# Altium PCB finalproject.PcbDoc
Units mil, origin at the board's own origin, x right, y up, seen from the top; angles counter-clockwise.
Board outline 3850 x 3500 mil, 2 copper layers (Top Layer, Bottom Layer); 22 components, 43 nets, 155 pads, 4 vias.
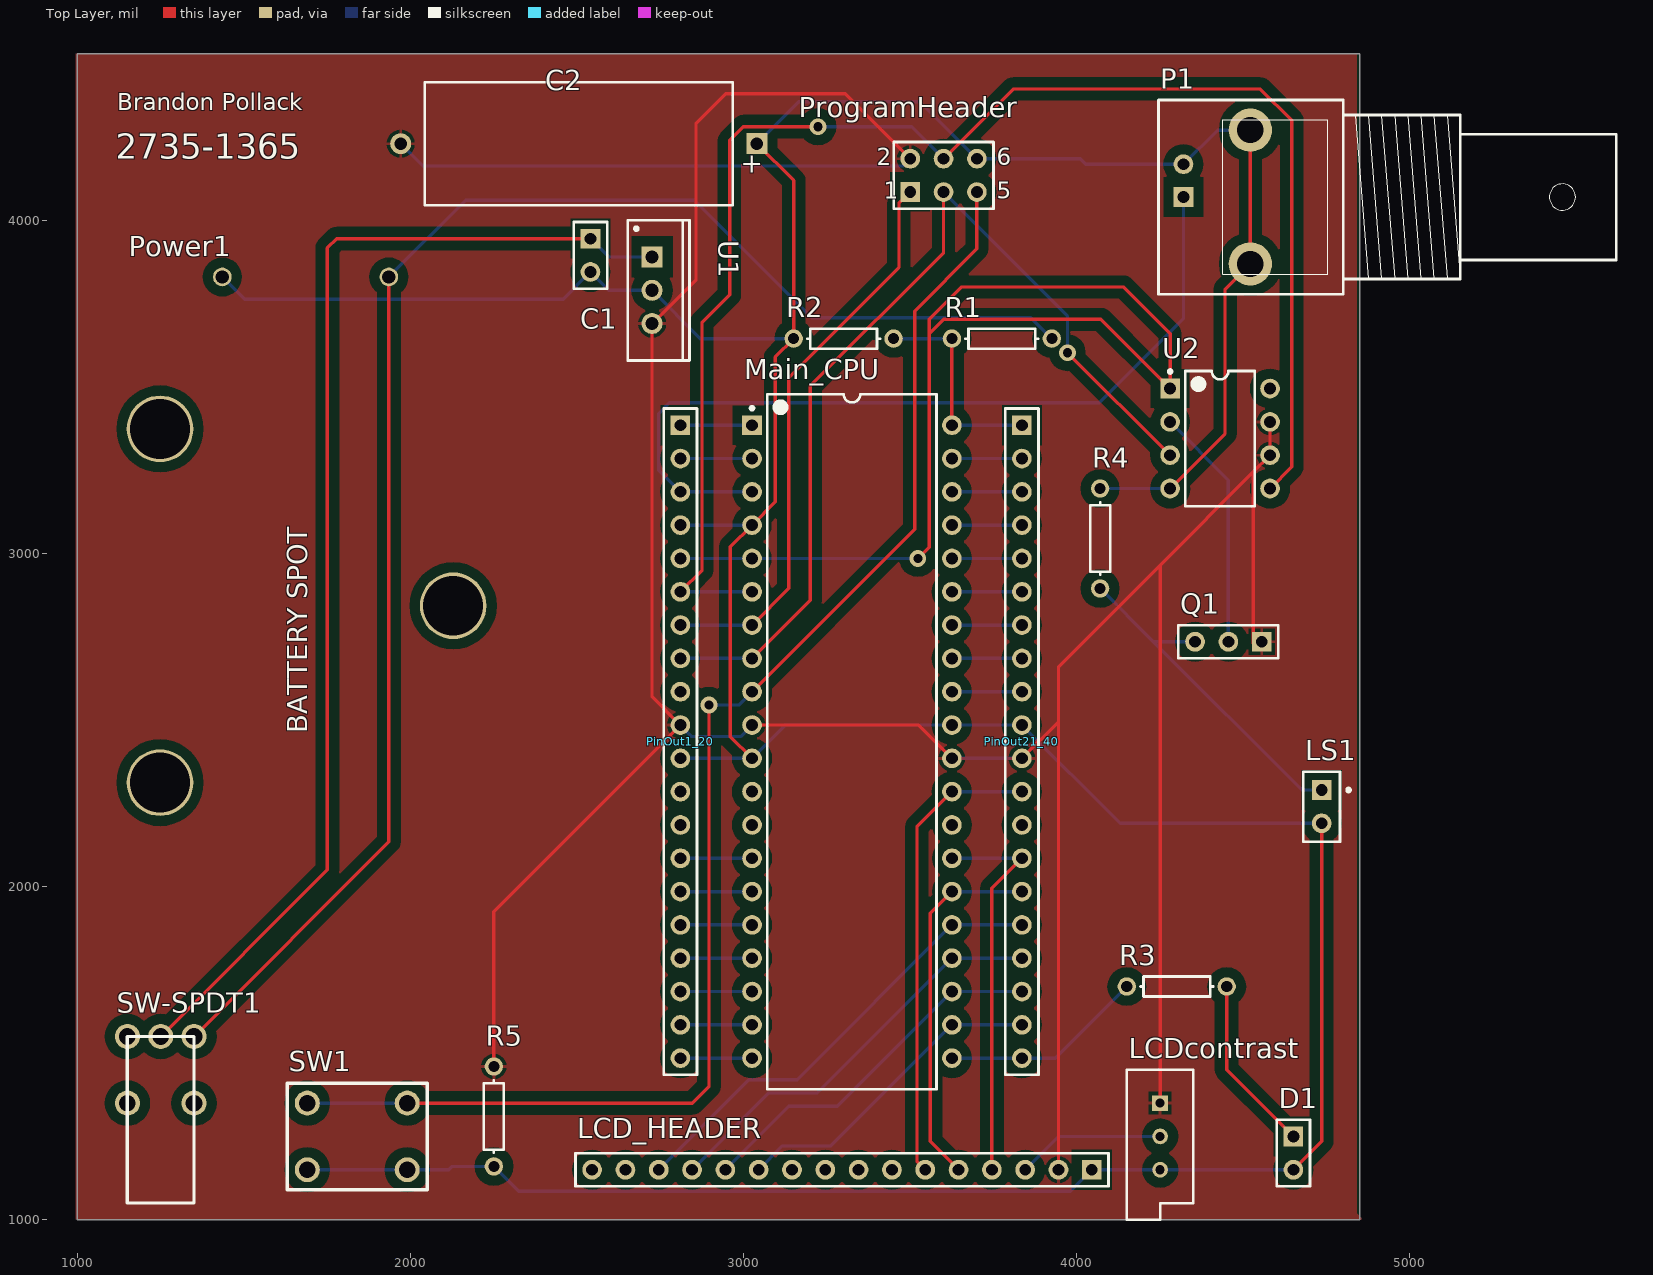
[diagram p0: Top Layer view]
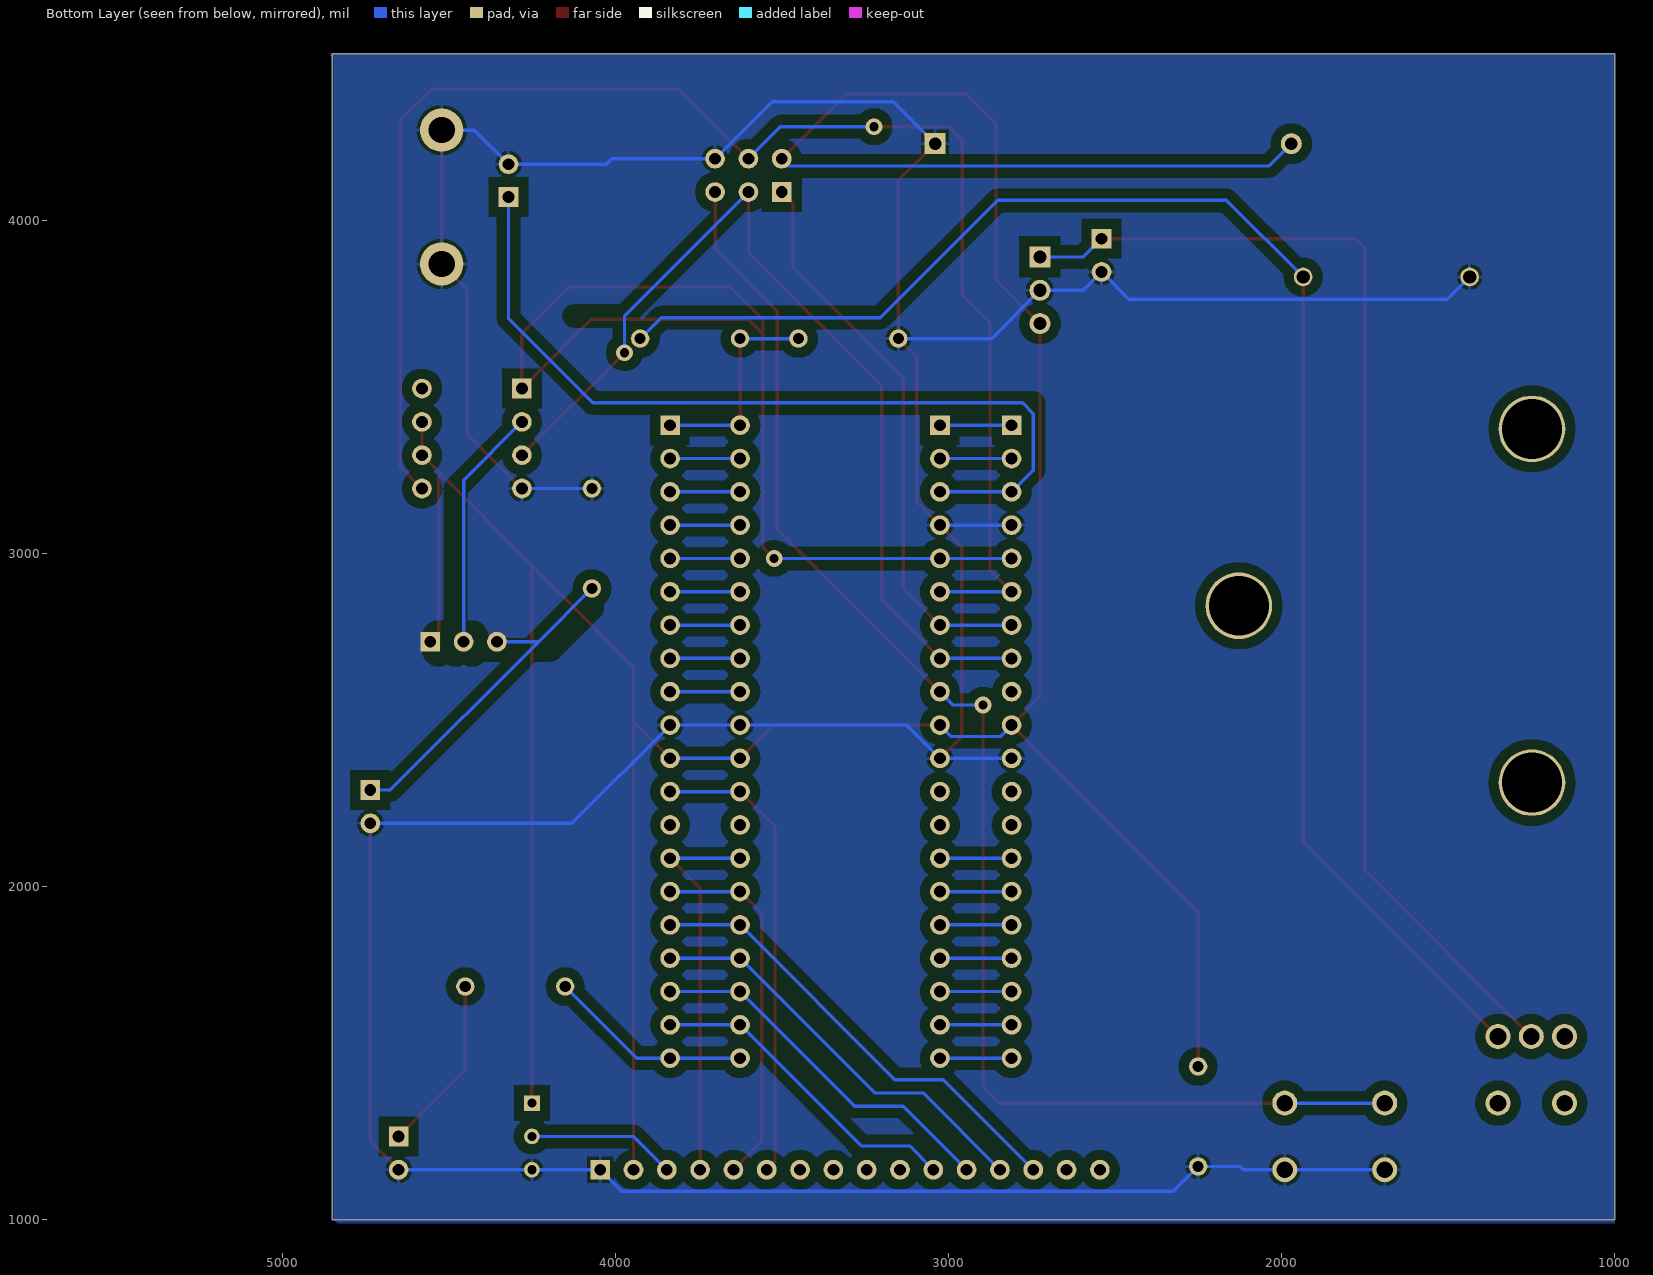
[diagram p1: Bottom Layer view, seen from below]

## Layer stack, top to bottom
Top Layer: signal copper 1.4
Dielectric: core 12.6, FR-4, Dk 4.8
Bottom Layer: signal copper 1.4

## Board outline
1000,1000 1000,4500 4850,4500 4850,1000 1000,1000

## Design rules (kind name [scope] priority, off if disabled: settings)
Clearance Poly [InPolygon] p1: gap=30
Clearance [All] p2: gap=10
PolygonConnect [All] p1: connectstyle=Relief reliefconductorwidth=10 reliefentries=4 polygonreliefangle="90 Angle" airgapwidth=10
RoutingVias [All] p1: holewidth=28 width=50 viastyle="Through Hole" minholewidth=28 minwidth=50 maxholewidth=28 maxwidth=50
ShortCircuit [All] p1: allowed=TRUE
SilkscreenOverComponentPads [All] p1: minsilkscreentomaskgap=10
SolderMaskExpansion [All] p1: expansion=4
Width [All] p1: maxlimit=100 minlimit=7 preferedwidth=10
26 further rules are at their usual default settings.

## Components (designator, comment, footprint, x,y, rotation, side; value= is the part's Value field where it differs from the comment)
C1 "Cap Pol1" HDR1X2 2540,3945 r270 top
C2 "Cap" CSR13-D 2505,4230 r180 top
D1 "LED0" HDR1X2 4650,1250 r270 top
LCD_HEADER "Header 16" HDR1X16 4045,1150 r180 top
LCDcontrast "RPot" VR5 4250,1250 r270 top
LS1 "Speaker" PIN2 4735,2290 r270 top
Main_CPU "ATmega324PA-PU" 40P6 3325,2435 r0 top
P1 "BNC FOR FREQGEN" "BNC_RA CON" 4320,4070 r180 top
PinOut1_20 "Header 20" HDR1X20 2810,3385 r270 top
PinOut21_40 "Header 20" HDR1X20 3835,3385 r270 top
Power1 "Battery Holder 9V" "PCBComponent_1 - duplicate" 1435,3830 r90 top
ProgramHeader "Header 3X2" HDR2X3 3500,4085 r0 top
Q1 "MOSFET-N" HDR1X3 4555,2735 r180 top
R1 "Res1" AXIAL-0.3 3775,3645 r0 top
R2 "Res2" AXIAL-0.3 3300,3645 r0 top
R3 "Res1" AXIAL-0.3 4300,1700 r0 top
R4 "Res1" AXIAL-0.3 4070,3045 r270 top
R5 "Res1" AXIAL-0.3 2250,1310 r90 top
SW1 "push button switch" SW-PUSH-4 1990,1350 r180 top
SW-SPDT1 "Component_1" PCBComponent_1 1250,1550 r0 top
U1 "LM2940T-5.0" T03B 2725,3790 r270 top
U2 "LTC1661" DIP-8 4430,3345 r0 top

## Footprints (in the part's own frame and the unit in brackets; to place one, negate y for a bottom-side part, rotate by r counter-clockwise, add the part's x,y. Pads: shape width x height; smd on the part's side, far side on the other; paste and mask are expansions set on the pad)
40P6 [mm] "DIP, 40-Leads, Row Spacing 15.24mm, Pitch 2.54mm, Body 52.2x13.95mm"
  rect 1.5x1.5 hole 0.9: 1(-7.62,24.13)
  round 1.5 hole 0.9: 2(-7.62,21.59) 3(-7.62,19.05) 4(-7.62,16.51) 5(-7.62,13.97) 6(-7.62,11.43) 7(-7.62,8.89) 8(-7.62,6.35) 9(-7.62,3.81) 10(-7.62,1.27) 11(-7.62,-1.27) 12(-7.62,-3.81) 13(-7.62,-6.35) 14(-7.62,-8.89) 15(-7.62,-11.43) 16(-7.62,-13.97) 17(-7.62,-16.51) 18(-7.62,-19.05) 19(-7.62,-21.59) 20(-7.62,-24.13) 21(7.62,-24.13) 22(7.62,-21.59) 23(7.62,-19.05) 24(7.62,-16.51) 25(7.62,-13.97) 26(7.62,-11.43) 27(7.62,-8.89) 28(7.62,-6.35) 29(7.62,-3.81) 30(7.62,-1.27) 31(7.62,1.27) 32(7.62,3.81) 33(7.62,6.35) 34(7.62,8.89) 35(7.62,11.43) 36(7.62,13.97) 37(7.62,16.51) 38(7.62,19.05) 39(7.62,21.59) 40(7.62,24.13)
  silkscreen extent -7.74,-26.5 6.45,26.5, body extent -7.05,-26.47 7.05,26.47, height 4.83
AXIAL-0.3 [mm] "Axial Device, Thru-Hole; 2 Leads; 0.3 in Pin Spacing"
  round 1.4 hole 0.85: 1(-3.81,0) 2(3.81,0)
  silkscreen extent -2.77,-0.76 2.77,0.76
"BNC_RA CON" [mm] "Connector; BNC Elbow"
  rect 1.5x1.5 hole 0.9: 1(0,0)
  round 3.3 hole 2: 2(-5.1,5.1) 2(-5.1,-5.1)
  round 1.5 hole 0.9: 2(0,-2.5)
  silkscreen extent -33,-7.4 1.9,7.4
CSR13-D [mm] "Capacitor, Axial, Polarised; Body 20.8 x 9.3 mm (LxDia. max), Lead Dia. 0.64 mm (typ)"
  rect 1.6x1.6 hole 0.95: 1(-13.58,0)
  round 1.6 hole 0.95: 2(13.58,0)
  silkscreen extent -11.75,-4.7 11.75,4.7
DIP-8 [mm] "DIP; 8 Leads; Row Spacing 7.62 mm; Pitch 2.54 mm"
  rect 1.5x1.5 hole 0.9: 1(-3.81,3.81)
  round 1.5 hole 0.9: 2(-3.81,1.27) 3(-3.81,-1.27) 4(-3.81,-3.81) 5(3.81,-3.81) 6(3.81,-1.27) 7(3.81,1.27) 8(3.81,3.81)
  silkscreen extent -3.93,-5.15 2.65,5.23, body extent -3.6,-5.15 3.6,5.15, height 5.08
HDR1X2 [mm] "Connector; Header; 2 Position"
  rect 1.5x1.5 hole 0.9: 1(0,0)
  round 1.5 hole 0.9: 2(2.54,0)
  silkscreen extent -1.27,-1.27 3.81,1.27
HDR1X3 [mm] "Connector; Header; 3 Position"
  rect 1.5x1.5 hole 0.9: 1(0,0)
  round 1.5 hole 0.9: 2(2.54,0) 3(5.08,0)
  silkscreen extent -1.27,-1.27 6.35,1.27
HDR1X16 [mm] "Connector; Header; 16 Position"
  rect 1.5x1.5 hole 0.9: 1(0,0)
  round 1.5 hole 0.9: 2(2.54,0) 3(5.08,0) 4(7.62,0) 5(10.16,0) 6(12.7,0) 7(15.24,0) 8(17.78,0) 9(20.32,0) 10(22.86,0) 11(25.4,0) 12(27.94,0) 13(30.48,0) 14(33.02,0) 15(35.56,0) 16(38.1,0)
  silkscreen extent -1.27,-1.27 39.37,1.27
HDR1X20 [mm] "Connector; Header; 20 Position"
  rect 1.5x1.5 hole 0.9: 1(0,0)
  round 1.5 hole 0.9: 2(2.54,0) 3(5.08,0) 4(7.62,0) 5(10.16,0) 6(12.7,0) 7(15.24,0) 8(17.78,0) 9(20.32,0) 10(22.86,0) 11(25.4,0) 12(27.94,0) 13(30.48,0) 14(33.02,0) 15(35.56,0) 16(38.1,0) 17(40.64,0) 18(43.18,0) 19(45.72,0) 20(48.26,0)
  silkscreen extent -1.27,-1.27 49.53,1.27
HDR2X3 [mm] "Connector; Header; 3x2 Position"
  rect 1.5x1.5 hole 0.9: 1(0,0)
  round 1.5 hole 0.9: 2(0,2.54) 3(2.54,0) 4(2.54,2.54) 5(5.08,0) 6(5.08,2.54)
  silkscreen extent -1.27,-1.27 6.35,3.81
PCBComponent_1 [mil]
  round 75 hole 50: 0(-100,0) 1(100,0) 2(0,0) 3(-100,-200) 3(100,-200)
  silkscreen extent -100,-500 100,0
"PCBComponent_1 - duplicate" [mil]
  round 56 hole 40: 1(0,-500) 2(0,0)
  round 200 hole 180: 3(-1518,187) 3(-987,-693) 3(-456,187)
PIN2 [mm] "Photosensitive Diode; 2 Leads"
  rect 1.5x1.5 hole 0.9: 1(0,0)
  round 1.5 hole 0.9: 2(2.54,0)
  silkscreen extent -1.4,-1.4 3.94,2.18
SW-PUSH-4 [mil]
  round 75 hole 50: 1(0,200) 1(300,200) 2(0,0) 2(300,0)
  silkscreen extent -60,-60 360,260
T03B [mm] "TO, Thru-Hole, Vertical, Heatsink Mounted; 3 In-Line Leads; Pitch 2.54 mm"
  rect 1.6x1.6 hole 1: 1(-2.54,0)
  round 1.6 hole 1: 2(0,0) 3(2.54,0)
  silkscreen extent -5.35,-1.85 5.35,2.85, body extent -5.4,-1.9 5.4,2.9, height 19.4
VR5 [mm] "Thru-Hole; 3 Leads"
  rect 1.2x1.2 hole 0.7: 1(-2.54,0)
  round 1.2 hole 0.7: 2(0,0) 3(2.54,0)
  silkscreen extent -5.08,-2.54 6.35,2.54

## Part data
C1: "Polarized Capacitor (Radial)"
C2: "Capacitor"
D1: "Typical INFRARED GaAs LED"
LCD_HEADER: "Header, 16-Pin"
LCDcontrast: "Potentiometer"
LS1: "Loudspeaker"
Main_CPU: "8-bit AVR Microcontroller, 32KB Flash, 1KB EEPROM, 2KB SRAM, 40-pin PDIP, Industrial Grade (-40°C to 85°C)"
P1: library part BNC, "BNC Elbow Connector"
PinOut1_20 PinOut21_40: "Header, 20-Pin"
ProgramHeader: "Header, 3-Pin, Dual row"
Q1: "N-Channel MOSFET"
R1 R3 R4 R5: "Resistor"
R2: library part Res1, "Resistor"
SW1: library part SW-PUSH
U1: "1A Low Dropout Regulator, 3-pin TO-220"
U2: library part "Header 4X2", "Header, 4-Pin, Dual row"

## Via types
v1: diameter 50, hole 28, Top Layer to Bottom Layer, 4 vias

## Nets (pads, with @x,y where several pads share a name; then routed paths per layer and width w, separated by ;. In a path a pad name is that pad's centre, name@x,y a point inside that pad or via, vN(x,y) a via of type N, cw(c..) or ccw(c..) an arc to the next point about the centre after c; other vN are vias at no path point)
+5VDC: C2.2 LCD_HEADER.2 LCDcontrast.1 Main_CPU.10 Main_CPU.30 PinOut1_20.10 PinOut21_40.11 ProgramHeader.2 Q1.1 R5.2 U1.3 U2.6 U2.7 | length 11368.8
  Top Layer w10: R5.2 2250,1925 PinOut1_20.10 2725,2570 U1.3 2857,3822 2857,4291.39 2945.61,4380 3305,4380 ProgramHeader.2 ; Main_CPU.10 3525,2485 Main_CPU.30 ; PinOut21_40.11 3945,2495 ; LCD_HEADER.2 3945,2495 ; LCDcontrast.1 4250,2965 ; Q1.1@4530,2730 4530,3245 ; U2.7 U2.6 4530,3245 ; 3945,2495 3945,2660 4250,2965 ; 4250,2965 4530,3245
  Bottom Layer w10: C2.2 2037.35,4163 3478,4163 ProgramHeader.2 ; PinOut1_20.10 2844.46,2450.54 2990.54,2450.54 Main_CPU.10 ; Main_CPU.30 PinOut21_40.11
+9VDC: Power1.1 R1.2 SW-SPDT1.1 | length 4779.5
  Top Layer w10: SW-SPDT1.1 1935,2135 Power1.1
  Bottom Layer w10: Power1.1 2165,4060 2852,4060 3204,3708 3862,3708 R1.2
ADC: Main_CPU.40 PinOut21_40.1 R1.1 R2.2 | length 645
  Top Layer w10: Main_CPU.40 R1.1
  Bottom Layer w10: R2.2 R1.1 ; Main_CPU.40 PinOut21_40.1
AIN: Main_CPU.3 P1.1 PinOut1_20.3 | length 2535
  Bottom Layer w10: Main_CPU.3 PinOut1_20.3 2745,3250 2745,3420 2777,3452 4067,3452 4320,3705 P1.1
AREF: Main_CPU.32 PinOut21_40.9 | length 210
  Bottom Layer w10: Main_CPU.32 PinOut21_40.9
DAC_TO_MOSFET: Q1.2 U2.2 | length 732.5
  Bottom Layer w10: U2.2 4455,3220 Q1.2
GND: C1.2 C2.1 D1.2 LCD_HEADER.1 LCDcontrast.3 LS1.2 Main_CPU.4 Main_CPU.11 Main_CPU.31 P1.2 PinOut1_20.4 PinOut1_20.11 PinOut21_40.10 Power1.2 ProgramHeader.6 R2.1 R4.1 R5.1 SW1.1 U1.2 U2.4 | length 13295.8
  Top Layer w10: Main_CPU.11 2960,2450 2960,3020 Main_CPU.4 3095,3155 3095,3590 R2.1 3150,4119.65 C2.1 ; U2.4 4445,3360 4445,3793.42 4520.79,3869.21 P1.2@4520.79,4270.79 ; D1.2 4735,1235 LS1.2
  Bottom Layer w10: Power1.2 1502,3763 2458,3763 C1.2 2595,3790 U1.2 2870,3645 R2.1 ; SW1.1@1690,1150 1990,1150 2115,1150 2125,1160 R5.1 2325,1085 3980,1085 LCD_HEADER.1 LCDcontrast.3 D1.2 ; PinOut1_20.11 Main_CPU.11 3125,2485 Main_CPU.31 PinOut21_40.10 4130,2190 LS1.2 ; PinOut1_20.4 Main_CPU.4 ; C2.1 3165.65,4356 3529,4356 ProgramHeader.6 4010,4185 4026.57,4168.43 4320,4168.43 4422.36,4270.79 P1.2@4520.79,4270.79 ; R4.1 U2.4
LCD_D4: LCD_HEADER.11 Main_CPU.22 PinOut21_40.19 | length 970.2
  Bottom Layer w10: LCD_HEADER.11 3116.42,1221.42 3261.42,1221.42 Main_CPU.22 PinOut21_40.19
LCD_D5: LCD_HEADER.12 Main_CPU.23 PinOut21_40.18 | length 1111.6
  Bottom Layer w10: LCD_HEADER.12 3135.47,1340.47 3280.47,1340.47 Main_CPU.23 PinOut21_40.18
LCD_D6: LCD_HEADER.13 Main_CPU.24 PinOut21_40.17 | length 1253
  Bottom Layer w10: LCD_HEADER.13 3075.47,1380.47 3220.47,1380.47 Main_CPU.24 PinOut21_40.17
LCD_D7: LCD_HEADER.14 Main_CPU.25 PinOut21_40.16 | length 1394.4
  Bottom Layer w10: LCD_HEADER.14 3015.47,1420.47 3160.47,1420.47 Main_CPU.25 PinOut21_40.16
LCD_E: LCD_HEADER.6 Main_CPU.29 PinOut21_40.12 | length 1398.8
  Top Layer w10: LCD_HEADER.6 3520,1175 3520,2180 Main_CPU.29
  Bottom Layer w10: Main_CPU.29 PinOut21_40.12
LCD_RS: LCD_HEADER.4 Main_CPU.27 PinOut21_40.14 | length 1182.3
  Top Layer w10: LCD_HEADER.4 3745,1995 PinOut21_40.14
  Bottom Layer w10: Main_CPU.27 PinOut21_40.14
LCD_RW: LCD_HEADER.5 Main_CPU.26 PinOut21_40.15 | length 1107.1
  Top Layer w10: Main_CPU.26 3560,1920 3560,1235 LCD_HEADER.5
  Bottom Layer w10: Main_CPU.26 PinOut21_40.15
LCD_VO: LCD_HEADER.3 LCDcontrast.2 | length 446.4
  Bottom Layer w10: LCD_HEADER.3 3945,1250 LCDcontrast.2
MISO: Main_CPU.7 PinOut1_20.7 ProgramHeader.1 | length 1711.8
  Top Layer w10: Main_CPU.7 3135,2895 3135,3527 3466.17,3858.17 3466.17,4051.17 ProgramHeader.1
  Bottom Layer w10: PinOut1_20.7 Main_CPU.7
MOSI: Main_CPU.6 PinOut1_20.6 ProgramHeader.4 U2.5 | length 4632.5
  Top Layer w10: PinOut1_20.6 2875,2950 2875,3694 2958,3777 2958,4240 2999,4281 v1(3223,4281) ; ProgramHeader.4 3809,4394 4551,4394 4645,4300 4645,3260 U2.5
  Bottom Layer w10: PinOut1_20.6 Main_CPU.6 ; v1(3223,4281) 3504,4281 ProgramHeader.4
NetC1_1: C1.1 SW-SPDT1.2 U1.1 | length 3583.5
  Top Layer w10: SW-SPDT1.2 1750,2050 1750,3917 1778,3945 C1.1
  Bottom Layer w10: C1.1 2595,3890 U1.1
NetD1_1: D1.1 R3.2 | length 532.8
  Top Layer w10: R3.2 4450,1450 D1.1
NetLS1_1: LS1.1 Q1.3 R4.2 | length 1040.6
  Bottom Layer w10: R4.2 4230,2735 ; Q1.3 4230,2735 ; LS1.1 4675,2290 4230,2735
PA1: Main_CPU.39 PinOut21_40.2 | length 210
  Bottom Layer w10: Main_CPU.39 PinOut21_40.2
PA2: Main_CPU.38 PinOut21_40.3 | length 210
  Bottom Layer w10: Main_CPU.38 PinOut21_40.3
PA3: Main_CPU.37 PinOut21_40.4 | length 210
  Bottom Layer w10: Main_CPU.37 PinOut21_40.4
PA4: Main_CPU.36 PinOut21_40.5 | length 210
  Bottom Layer w10: Main_CPU.36 PinOut21_40.5
PA5: Main_CPU.35 PinOut21_40.6 | length 210
  Bottom Layer w10: Main_CPU.35 PinOut21_40.6
PA6: Main_CPU.34 PinOut21_40.7 | length 210
  Bottom Layer w10: Main_CPU.34 PinOut21_40.7
PA7: Main_CPU.33 PinOut21_40.8 | length 210
  Bottom Layer w10: Main_CPU.33 PinOut21_40.8
PB0: Main_CPU.1 PinOut1_20.1 | length 215
  Bottom Layer w10: PinOut1_20.1 Main_CPU.1
PB1: Main_CPU.2 PinOut1_20.2 | length 215
  Bottom Layer w10: PinOut1_20.2 Main_CPU.2
PC6: PinOut21_40.13
PD0: Main_CPU.14 PinOut1_20.14 | length 215
  Bottom Layer w10: PinOut1_20.14 Main_CPU.14
PD1: Main_CPU.15 PinOut1_20.15 | length 215
  Bottom Layer w10: PinOut1_20.15 Main_CPU.15
PD2: Main_CPU.16 PinOut1_20.16 | length 215
  Bottom Layer w10: PinOut1_20.16 Main_CPU.16
PD3: Main_CPU.17 PinOut1_20.17 | length 215
  Bottom Layer w10: PinOut1_20.17 Main_CPU.17
PD4: Main_CPU.18 PinOut1_20.18 | length 215
  Bottom Layer w10: PinOut1_20.18 Main_CPU.18
PD5: Main_CPU.19 PinOut1_20.19 | length 215
  Bottom Layer w10: PinOut1_20.19 Main_CPU.19
PD6: Main_CPU.20 PinOut1_20.20 | length 215
  Bottom Layer w10: PinOut1_20.20 Main_CPU.20
PD7: Main_CPU.21 PinOut21_40.20 R3.1 | length 614.1
  Bottom Layer w10: Main_CPU.21 PinOut21_40.20 3935,1485 R3.1
RESET: Main_CPU.9 ProgramHeader.5 SW1.2 | length 4296.9
  Top Layer w10: SW1.2@1990,1350 2846,1350 2896,1400 v1(2896,2545) ; Main_CPU.9 3513,3073 3513,3727 3700,3914 ProgramHeader.5
  Bottom Layer w10: SW1.2@1690,1350 SW1.2@1990,1350 ; v1(2896,2545) 2985,2545 Main_CPU.9
SCK: Main_CPU.8 PinOut1_20.8 ProgramHeader.3 U2.3 | length 2924.8
  Top Layer w10: Main_CPU.8 3200,2860 3200,3503 3600,3903 ProgramHeader.3 ; v1(3972,3603) U2.3
  Bottom Layer w10: PinOut1_20.8 Main_CPU.8 ; ProgramHeader.3 3972,3713 v1(3972,3603)
SS: Main_CPU.5 PinOut1_20.5 U2.1 | length 3258.2
  Top Layer w10: v1(3523,2985) 3557,3019 3557,3660 ; 3557,3660 3557,3703 3654,3800 4140,3800 4280,3660 U2.1 4072,3703 3600,3703 3557,3660
  Bottom Layer w10: PinOut1_20.5 Main_CPU.5 v1(3523,2985)
XTAL1: PinOut1_20.13
XTAL2: PinOut1_20.12
pads on no net: LCD_HEADER.7 LCD_HEADER.8 LCD_HEADER.9 LCD_HEADER.10 LCD_HEADER.15 LCD_HEADER.16 Main_CPU.12 Main_CPU.13 Main_CPU.28 PinOut1_20.9 Power1.3 SW-SPDT1.0 SW-SPDT1.3 U2.8

## Polygon pours and split planes (outlines as drawn)
+5VDC on Top Layer "VCCpour" (solid, pour order 4): 995,4500 995,995 1000,1000 4860,1000 4840,1020 4840,4500 990,4500
GND on Bottom Layer "VCCpour" (solid, pour order 6): 1000,4500 1000,995 995,990 4835,990 4845,1000 4845,4485 4860,4500

## Silkscreen, mask and mechanical layers (free items; w line width, h text height)
Top Overlay:
  text "Brandon Pollack" at 1120,4330 h50
  text "2735-1365" at 1115,4185 h75

## Text inside footprints (layer, text, board x,y; h text height)
C2: Top Overlay "+" at 3059.33,4193.58 h59.06 r180
Power1: Top Overlay "BATTERY SPOT" at 1690,2460 h60 r90
ProgramHeader: Top Overlay "1" at 3420,4065 h50; Top Overlay "2" at 3400,4165 h50; Top Overlay "5" at 3760,4065 h50; Top Overlay "6" at 3760,4165 h50